# Altium PCB PCB_board.PcbDoc
Units mil, origin at the board's own origin, x right, y up, seen from the top; angles counter-clockwise.
Board outline 6000 x 4000 mil, 2 copper layers (Top Layer, Bottom Layer); 7 components, 9 nets, 83 pads, 0 vias.
Unrouted connection lines stored in the file: 9.
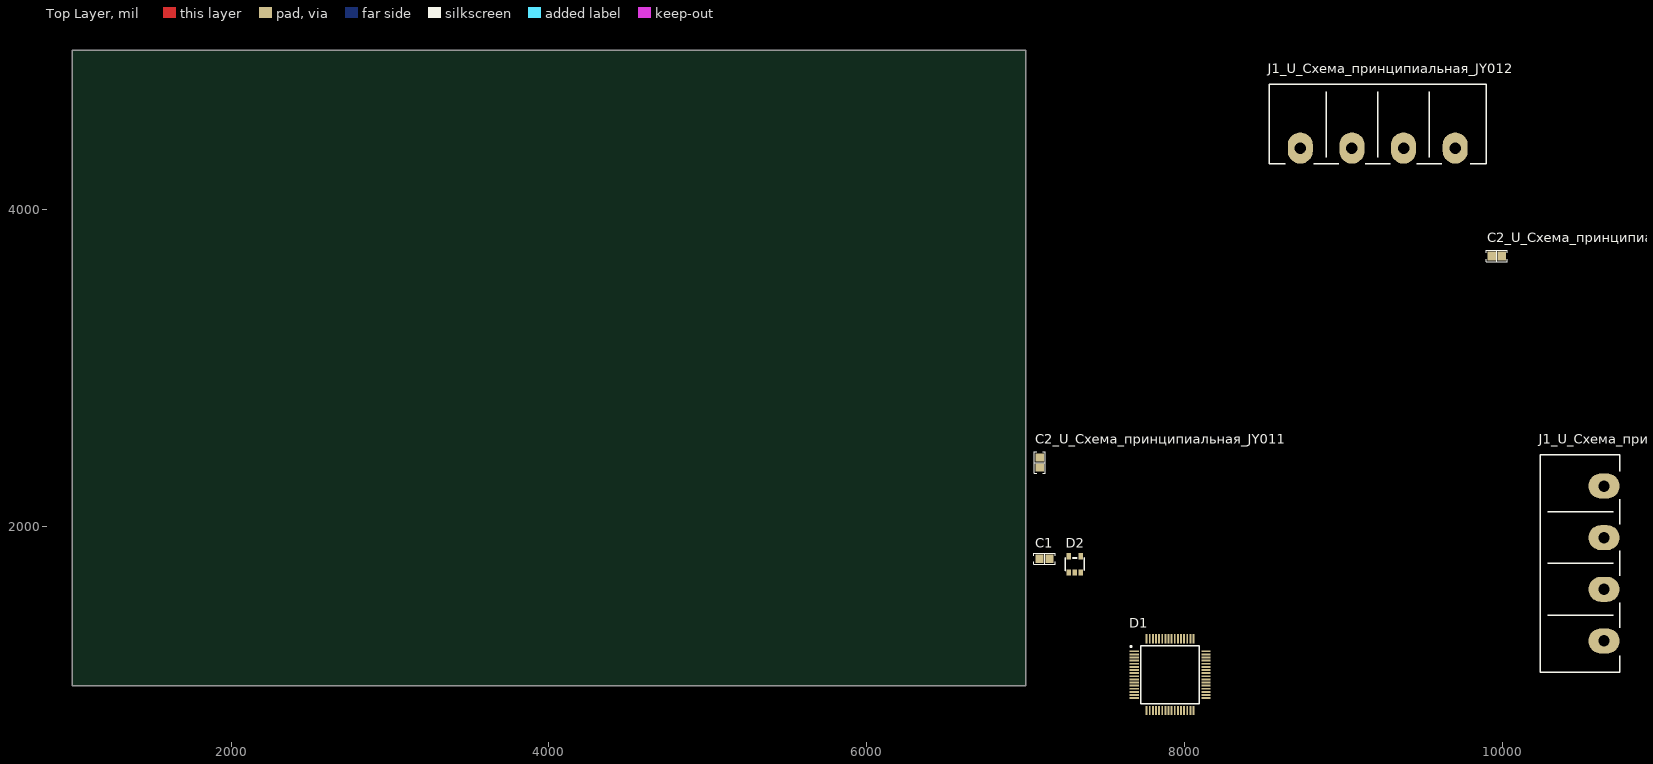
[diagram p0: Top Layer view]
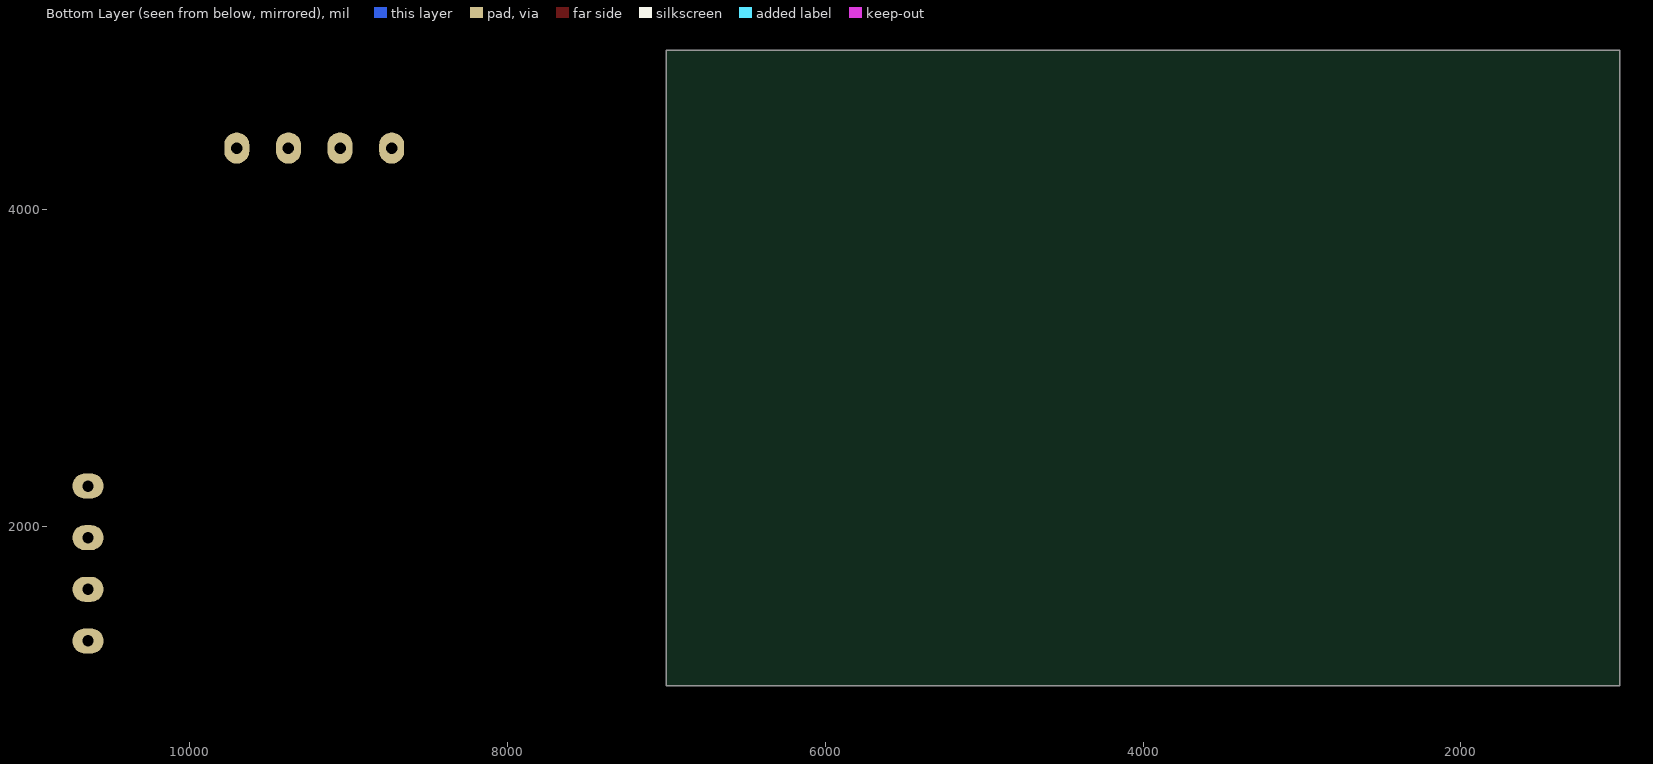
[diagram p1: Bottom Layer view, seen from below]

## Layer stack, top to bottom
Top Solder: solder mask 0.4, Solder Resist, Dk 3.5
Top Layer: signal copper 1.4
Dielectric 1: dielectric 12.6, FR-4, Dk 4.8
Bottom Layer: signal copper 1.4
Bottom Solder: solder mask 0.4, Solder Resist, Dk 3.5

## Board outline
1000,1000 7000,1000 7000,5000 1000,5000

## Design rules (kind name [scope] priority, off if disabled: settings)
Clearance [All] p1: gap=10 ignorepadtopadclearanceinfootprint=FALSE except(0: Arc-Hole Track-Hole SMDPad-Hole THPad-Hole Via-Hole Fill-Hole Poly-Hole Region-Hole Text-Hole)
PolygonConnect [All] p1: connectstyle=Relief reliefconductorwidth=10 reliefentries=4 polygonreliefangle="90 Angle" airgapwidth=10
RoutingVias [All] p1: holewidth=28 width=50 viastyle="Through Hole" minholewidth=28 minwidth=50 maxholewidth=28 maxwidth=50
SolderMaskExpansion [All] p1: expansion=4 istentingtop=FALSE
Width [All] p1: maxlimit=10 minlimit=10 preferedwidth=10
30 further rules are at their usual default settings.

## Classes and differential pairs
channel class Схема_принципиальная_JY01: U_Схема_принципиальная_JY011 U_Схема_принципиальная_JY012
component class U_Схема_принципиальная_JY012: C2_U_Схема_принципиальная_JY012 J1_U_Схема_принципиальная_JY012
component class U_Схема_принципиальная_JY011: C2_U_Схема_принципиальная_JY011 J1_U_Схема_принципиальная_JY011
component class Схема_принципиальная_общая: C1 D1 D2

## Components (designator, comment, footprint, x,y, rotation, side; value= is the part's Value field where it differs from the comment)
C1 "10000 pF" "CAP 0805_2012" 7120,1800 r0 top
C2_U_Схема_принципиальная_JY011 "470 pF" "CAP 0805_2012" 7090,2405 r90 top (schematic designator C2)
C2_U_Схема_принципиальная_JY012 "470 pF" "CAP 0805_2012" 9966.5,3705 r0 top (schematic designator C2)
D1 "" QFP50P1200X1200X160-64N 7910,1070 r0 top
D2 "" RT9193 7310,1765 r0 top
J1_U_Схема_принципиальная_JY011 "4DB-P108-04" "TE 4DB-P108-04" 10490,1770 r90 top (schematic designator J1)
J1_U_Схема_принципиальная_JY012 "4DB-P108-04" "TE 4DB-P108-04" 9217.5,4536.57 r0 top (schematic designator J1)

## Footprints (in the part's own frame and the unit in brackets; to place one, negate y for a bottom-side part, rotate by r counter-clockwise, add the part's x,y. Pads: shape width x height; smd on the part's side, far side on the other; paste and mask are expansions set on the pad)
"CAP 0805_2012" [mm] "Chip Capacitor, 2-Leads, Body 2.00x1.20mm, IPC Medium Density"
  rect 1.3x1.4 smd: 1(-0.8,0) 2(0.8,0)
  silkscreen extent -1.7,-0.9 1.7,0.9, body extent -1,-0.64 1,0.64, height 1.26
QFP50P1200X1200X160-64N [mm]
  rect 1.475x0.3 smd: 1(-5.738,3.75) 2(-5.738,3.25) 3(-5.738,2.75) 4(-5.738,2.25) 5(-5.738,1.75) 6(-5.738,1.25) 7(-5.738,0.75) 8(-5.738,0.25) 9(-5.738,-0.25) 10(-5.738,-0.75) 11(-5.738,-1.25) 12(-5.738,-1.75) 13(-5.738,-2.25) 14(-5.738,-2.75) 15(-5.738,-3.25) 16(-5.738,-3.75) 33(5.738,-3.75) 34(5.738,-3.25) 35(5.738,-2.75) 36(5.738,-2.25) 37(5.738,-1.75) 38(5.738,-1.25) 39(5.738,-0.75) 40(5.738,-0.25) 41(5.738,0.25) 42(5.738,0.75) 43(5.738,1.25) 44(5.738,1.75) 45(5.738,2.25) 46(5.738,2.75) 47(5.738,3.25) 48(5.738,3.75)
  rect 0.3x1.475 smd: 17(-3.75,-5.738) 18(-3.25,-5.738) 19(-2.75,-5.738) 20(-2.25,-5.738) 21(-1.75,-5.738) 22(-1.25,-5.738) 23(-0.75,-5.738) 24(-0.25,-5.738) 25(0.25,-5.738) 26(0.75,-5.738) 27(1.25,-5.738) 28(1.75,-5.738) 29(2.25,-5.738) 30(2.75,-5.738) 31(3.25,-5.738) 32(3.75,-5.738) 49(3.75,5.738) 50(3.25,5.738) 51(2.75,5.738) 52(2.25,5.738) 53(1.75,5.738) 54(1.25,5.738) 55(0.75,5.738) 56(0.25,5.738) 57(-0.25,5.738) 58(-0.75,5.738) 59(-1.25,5.738) 60(-1.75,5.738) 61(-2.25,5.738) 62(-2.75,5.738) 63(-3.25,5.738) 64(-3.75,5.738)
  silkscreen extent -6.35,-4.65 4.65,4.65, body extent -6,-6 6,6, height 1.6
RT9193 [mm]
  rect 0.7x1 smd: 1(-0.95,-1.3) 2(0,-1.3) 3(0.95,-1.3) 4(0.95,1.3) 5(-0.95,1.3)
  silkscreen extent -1.55,-1 1.55,1
"TE 4DB-P108-04" [mm] "Assembly, Dual Barrier 4DB P108"
  oval 4x5 hole 1.829: 1(-12.383,-3.85) 2(-4.127,-3.85) 3(4.127,-3.85) 4(12.383,-3.85)
  silkscreen extent -17.35,-6.35 17.35,6.35, body extent -17.34,-6.35 17.34,6.35, height 14.47

## Part data
C1: library part C0805X103K1GECAUTO, "CAP CER 0805 10NF 100V C0G 10%", Device Package="0805 (2012 Metric)", manufacturer=KEMET, Operating Temperature="-55°C ~ 125°C", Ratings=AEC-Q200, Supplier Part Number 1=399-17172-1-ND, Temperature Coefficient="C0G, NP0", Tolerance=±10%, Voltage - Rated=100V, Applications="Automotive, ESD Protection", Capacitance="10000 pF", componentlink1description=Datasheet, componentlink1url=https://api.kemet.com/component-edge/download/datasheet/C0805X103K1GECAUTO.pdf, componentlink2description="DigiKey Link", componentlink2url=https://www.digikey.com/en/products/detail/kemet/C0805X103K1GECAUTO/8563700, Features="Low ESL", lastupdated="09.02.2024 20:16:08", Lifecycle Status=Active, Minimum Order=1, Mounting Type="Surface Mount, MLCC", Package / Case="0805 (2012 Metric)", packaging=TapeAndReel, Part Number=C0805X103K1GECAUTO, Part Status=Active, partid=2654, price=0.06, series="ESD SMD Auto C0G", Size / Dimension="0.079\" L x 0.049\" W (2.00mm x 1.25mm)", Supplier 1=DigiKey, Thickness (Max)="0.039\" (1.00mm)"
C2_U_Схема_принципиальная_JY011 C2_U_Схема_принципиальная_JY012: library part C0805S471K5RACAUTO, "CAP CER 470PF 50V X7R 0805", Device Package="0805 (2012 Metric)", manufacturer=KEMET, Operating Temperature="-55°C ~ 125°C", Ratings=AEC-Q200, Supplier Part Number 1=399-19424-1-ND, Temperature Coefficient=X7R, Tolerance=±10%, Voltage - Rated=50V, Applications=Automotive, Capacitance="470 pF", componentlink1description=Datasheet, componentlink1url=https://api.kemet.com/component-edge/download/datasheet/C0805S471K5RACAUTO.pdf, componentlink2description="DigiKey Link", componentlink2url=https://www.digikey.com/en/products/detail/kemet/C0805S471K5RACAUTO/9742175, Features="Floating Electrode", lastupdated="09.02.2024 20:16:08", Lifecycle Status=Active, Minimum Order=1, Mounting Type="Surface Mount, MLCC", Package / Case="0805 (2012 Metric)", packaging=TapeAndReel, Part Number=C0805S471K5RACAUTO, Part Status=Active, partid=2648, price=0.05, series="SMD Auto X7R FE", Size / Dimension="0.079\" L x 0.049\" W (2.00mm x 1.25mm)", Supplier 1=DigiKey, Thickness (Max)="0.035\" (0.88mm)"
D1: library part STM32G474RBT6, "LQFP is a 64 pins, 10 x 10 mm low-profile quad flat package.", Manufacturer_Name=STMicroelectronics, Mouser Part Number=511-STM32G474RBT6, Arrow Part Number=STM32G474RBT6, Arrow Price/Stock=https://www.arrow.com/en/products/stm32g474rbt6/stmicroelectronics?region=nac, Datasheet Link=https://www.mouser.com/datasheet/2/389/stm32g474cb-1600828.pdf, Geometry.Height=1.6mm, Manufacturer_Part_Number=STM32G474RBT6, Mouser Price/Stock=https://www.mouser.co.uk/ProductDetail/STMicroelectronics/STM32G474RBT6?qs=uwxL4vQweFP0uAZUZXLBhQ%3D%3D
D2: library part RT9193
J1_U_Схема_принципиальная_JY011 J1_U_Схема_принципиальная_JY012: "CONN BARRIER STRIP 4CIRC 0.325\"", Color=Black, Current Rating (Amps)=20A, manufacturer="TE Connectivity AMP Connectors", Supplier Part Number 1=A98474-ND, Voltage Rating=150V, Barrier Type="2 Wall (Dual)", Bottom Termination="PC Pin", componentlink1description=Datasheet, componentlink1url=https://www.te.com/commerce/DocumentDelivery/DDEController?Action=srchrtrv&DocNm=2-1437667-4&DocType=Customer+Drawing&DocLang=English, componentlink2description="DigiKey Link", componentlink2url=http://digikey.com/product-detail/en/te-connectivity-amp-connectors/4DB-P108-04/A98474-ND/1277922, lastupdated="15.01.2020 4:13:12", Lifecycle Status=Active, Minimum Order=1, Number of Circuits=4, Number of Rows=1, Number of Wire Entries=4, packaging=Bulk, Part Number=4DB-P108-04, Part Status=Active, Pitch="0.325\" (8.26mm)", price=2.22, series="4DB, Buchanan", Supplier 1=DigiKey, Terminal Block Type="Barrier Block", Top Termination="Screws with Captive Plate", Wire Gauge="12-22 AWG"

## Nets (pads, with @x,y where several pads share a name; then routed paths per layer and width w, separated by ;. In a path a pad name is that pad's centre, name@x,y a point inside that pad or via, vN(x,y) a via of type N, cw(c..) or ccw(c..) an arc to the next point about the centre after c; other vN are vias at no path point)
Fwd/Rev_1: D1.50 J1_U_Схема_принципиальная_JY011.1
Fwd/Rev_2: D1.47 J1_U_Схема_принципиальная_JY012.1
GND_U_Схема_принципиальная_JY011: C2_U_Схема_принципиальная_JY011.2 J1_U_Схема_принципиальная_JY011.4
GND_U_Схема_принципиальная_JY012: C2_U_Схема_принципиальная_JY012.2 J1_U_Схема_принципиальная_JY012.4
NetC1_1: C1.1 D2.4
NetC2_U_Схема_принципиальная_JY011_1: C2_U_Схема_принципиальная_JY011.1 J1_U_Схема_принципиальная_JY011.3
NetC2_U_Схема_принципиальная_JY012_1: C2_U_Схема_принципиальная_JY012.1 J1_U_Схема_принципиальная_JY012.3
Speed_1: D1.60 J1_U_Схема_принципиальная_JY011.2
Speed_2: D1.57 J1_U_Схема_принципиальная_JY012.2
pads on no net: C1.2 D1.1 D1.2 D1.3 D1.4 D1.5 D1.6 D1.7 D1.8 D1.9 D1.10 D1.11 D1.12 D1.13 D1.14 D1.15 D1.16 D1.17 D1.18 D1.19 D1.20 D1.21 D1.22 D1.23 D1.24 D1.25 D1.26 D1.27 D1.28 D1.29 D1.30 D1.31 D1.32 D1.33 D1.34 D1.35 D1.36 D1.37 D1.38 D1.39 D1.40 D1.41 D1.42 D1.43 D1.44 D1.45 D1.46 D1.48 D1.49 D1.51 D1.52 D1.53 D1.54 D1.55 D1.56 D1.58 D1.59 D1.61 D1.62 D1.63 D1.64 D2.1 D2.2 D2.3 D2.5